# EAGLE board Display-KeyboardModule_v8 (EAGLE 9.6.2)
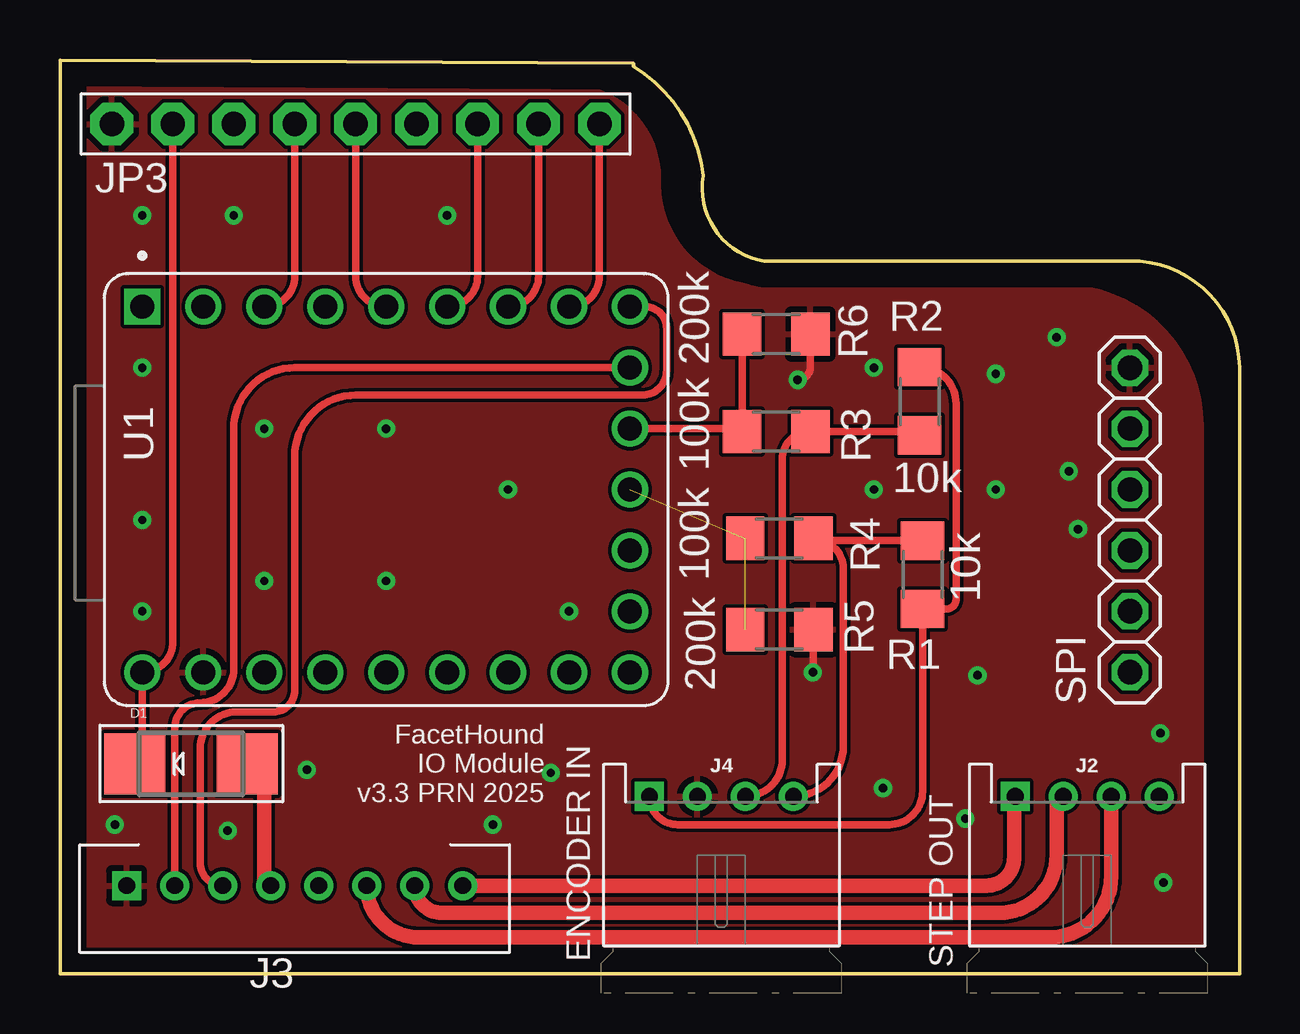
[diagram p0: board, top side]
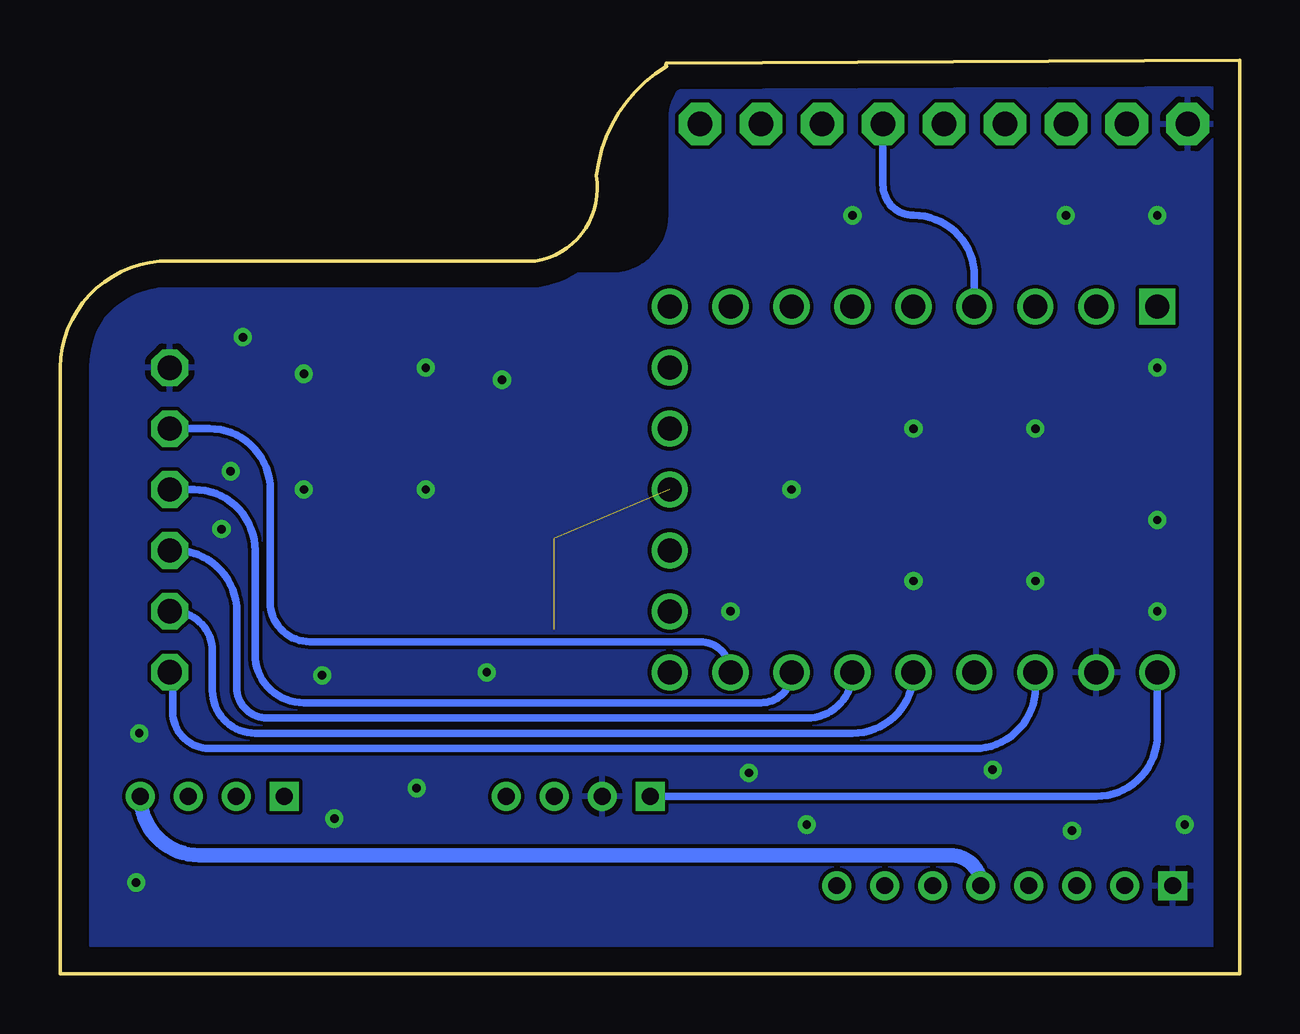
[diagram p1: board, bottom side, seen from below]

Size 49.15 x 38.1 mm. Coordinates in mm from the lower left corner, seen from the top.
Outline: 0,38.1 0,0 49.15,0 49.15,25.27 arc90 44.58,29.72 29.34,29.72 arc-90 26.8,33.27 arc52 23.88,37.85 arc90 23.88,37.97 0,38.1
Copper layers (1*16): Top 0.035mm / dielectric 1.5mm / Bottom 0.035mm
Design rules "default": minimum track width 6mil, minimum drill 0.35mm, track to track 6mil, track to pad 6mil, pad to pad 6mil, via to via 6mil, smd to smd 6mil, copper to edge 40mil, drill to drill 6mil, minimum pad ring 10mil, minimum via ring 8mil, stop-mask expansion 4mil, vias tented up to drill 0mil, thermal gap 10mil

## Footprints (pad centres in the part's own frame; a part is rotated, then mirrored left to right if it is on the bottom)
SMADIODE = smd 2.54 x 2.54: A 2.349,0; C -2.349,0
S4B-PH-KL = drill 0.7 square: 1 3,-3.72 | drill 0.7: 2 1,-3.72; 3 -1,-3.72; 4 -3,-3.72
B8B-PH-K-S = drill 0.7 square: 1 7,0 | drill 0.7: 2 5,0; 3 3,0; 4 1,0; 5 -1,0; 6 -3,0; 7 -5,0; 8 -7,0
1X09-BIG = drill 1.016 pad 1.778 octagon: 1 -10.16,0; 2 -7.62,0; 3 -5.08,0; 4 -2.54,0; 5 0,0; 6 2.54,0; 7 5.08,0; 8 7.62,0; 9 10.16,0
R1206 = smd 1.6 x 1.803: 1 -1.422,0; 2 1.422,0
1X06 = drill 1.016 octagon: 1 -6.35,0; 2 -3.81,0; 3 -1.27,0; 4 1.27,0; 5 3.81,0; 6 6.35,0
MODULE_RP2040-ZERO = drill 1 square: 1 7.62,10.16 | drill 1: 2 7.62,7.62; 3 7.62,5.08; 4 7.62,2.54; 5 7.62,0; 6 7.62,-2.54; 7 7.62,-5.08; 8 7.62,-7.62; 9 7.62,-10.16; 10 5.08,-10.16; 11 2.54,-10.16; 12 0,-10.16; 13 -2.54,-10.16; 14 -5.08,-10.16; 15 -7.62,-10.16; 16 -7.62,-7.62; 17 -7.62,-5.08; 18 -7.62,-2.54; 19 -7.62,0; 20 -7.62,2.54; 21 -7.62,5.08; 22 -7.62,7.62; 23 -7.62,10.16

## Placement (x,y rotation side)
D1  [SMADIODE]  5.46,8.76 0 top
J2  JST-PH-4_TH-RA  [S4B-PH-KL]  42.8,3.68 180 top
J3  B8B-PH-K-S  [B8B-PH-K-S]  9.78,3.68 180 top
J4  JST-PH-4_TH-RA  [S4B-PH-KL]  27.56,3.68 180 top
JP3  [1X09-BIG]  12.32,35.43 0 top
R1  10k  [R1206]  35.94,16.64 270 top
R2  10k  [R1206]  35.81,23.88 90 top
R3  100k  [R1206]  29.84,22.61 180 top
R4  100k  [R1206]  29.97,18.16 180 top
R5  200k  [R1206]  29.97,14.35 0 top
R6  200k  [R1206]  29.84,26.67 0 top
SPI  [1X06]  44.58,18.92 90 top
U1  RP2040-ZERO'  [MODULE_RP2040-ZERO]  13.59,20.19 90 top

## Library data of the parts
D1 JP3 R1-R6 SPI = adafruit
J2 J4 = con-JST-PH; MF: JST; MPN: S4B-PH-KL
J3 = con-JST-PH
U1 = RP2040-ZERO; AVAILABILITY: Not in stock; CHECK_PRICES: https://www.snapeda.com/parts/RP2040-ZERO/Waveshare+Electronics/view-part/?ref=eda; DESCRIPTION: Low-Cost, High-Performance Pico-Like MCU Board Based On Raspberry Pi Microcontroller RP2040; MF: Waveshare Electronics; MP: RP2040-ZERO; PACKAGE: Package; PRICE: None; SNAPEDA_LINK: https://www.snapeda.com/parts/RP2040-ZERO/Waveshare+Electronics/view-part/?ref=snap

## Nets
5V: D1.C J4.1 JP3.2 R1.2 R2.2 U1.23
GND: J3.1 J4.2 JP3.1 R5.2 R6.2 SPI.6 U1.22
N$1: D1.A J3.4
N$2: J2.1 J3.8
N$3: JP3.4 U1.3
N$4: J3.3 U1.9
N$5: J3.2 U1.10
N$6: JP3.6 U1.4
N$7: JP3.5 U1.5
N$8: JP3.7 U1.6
N$9: JP3.8 U1.7
N$10: JP3.9 U1.8
N$11: SPI.2 U1.19
N$12: J4.3 R2.1 R3.1
N$13: J2.2 J3.7
N$14: J2.3 J3.6
N$15: J2.4 J3.5
N$16: SPI.3 U1.18
N$17: J4.4 R1.1 R4.1
N$18: SPI.4 U1.17
N$20: R3.2 R6.1 U1.11
N$21: SPI.5 U1.16
N$22: SPI.1 U1.21
N$23: R4.2 R5.1 U1.12

## Tracks (layer width: path | path; a pad name or v marks a point on that pad's centre or on a via)
5V
  Top 0.305: JP3.2 4.7,13.84 arc-90 U1.23 3.43,9.08 arc-90 D1.C | R2.2 arc-90 37.34,23.77 37.34,15.62 arc-90 36.93,15.21 R1.2 35.94,7.62 arc-90 34.54,6.22 25.74,6.22 arc-90 J4.1
  Top 0.61: 3.43,9.08 D1.C
  Bottom 0.305: U1.23 3.43,9.94 arc90 5.97,7.4 J4.1
GND  (via drill 0.35)
  Top 0.305: R6.2 31.27,25.3 arc-90 v30.73,24.77 | R5.2 31.39,12.6 arc-90 v31.37,12.57
  other vias: 3.43,15.11 3.43,18.92 3.43,25.27 3.43,31.62 7.24,31.62 16.13,31.62 13.59,22.73 8.51,22.73 8.51,16.38 13.59,16.38 18.67,20.19 21.21,15.11 33.91,20.19 33.91,25.27 41.53,26.54 38.99,20.19 38.99,25.02 42.04,20.96 42.42,18.54 38.23,12.45 45.85,10.03 34.29,7.75 37.72,6.48 45.97,3.81 20.45,8.38 18.03,6.22 6.98,5.97 2.29,6.22 10.29,8.51
  pour Bottom: 0.89,37.59 0.89,1.14 47.88,1.14 47.88,25.27 arc90 43.94,29.21 26.16,29.21 arc-90 23.75,31.62 23.75,35.69 arc90 21.84,37.59
  pour Top: 0.89,37.08 0.89,1.14 47.62,1.14 47.62,22.86 arc90 41.78,28.7 29.21,28.7 arc-90 25.02,32.89 25.02,33.15 arc90 21.08,37.08
N$1
  Top 0.61: J3.4 8.51,3.95 8.51,8.76 D1.A
N$2
  Top 0.61: J3.8 38.61,3.68 arc90 39.75,4.83 39.75,7.36 arc-90 J2.1
N$3
  Top 0.305: U1.3 arc90 9.78,29.08 JP3.4
N$4
  Top 0.305: J3.3 arc-90 5.84,4.62 5.84,9.4 arc-90 7.37,10.92 8.89,10.92 arc90 9.78,11.81 9.78,21.59 arc-90 12.32,24.13 24.26,24.13 arc90 25.27,25.15 25.27,26.92 arc90 24.38,27.81 U1.9
N$5
  Top 0.305: J3.2 4.78,10.24 arc-90 5.84,11.3 arc90 7.24,12.7 7.24,22.73 arc-90 9.78,25.27 U1.10
N$6
  Bottom 0.305: U1.4 11.05,29.08 arc-90 13.59,31.62 arc90 14.86,32.89 JP3.6
N$7
  Top 0.305: U1.5 arc-90 12.32,29.08 JP3.5
N$8
  Top 0.305: U1.6 arc90 17.4,29.08 JP3.7
N$9
  Top 0.305: U1.7 arc90 19.94,29.08 JP3.8
N$10
  Top 0.305: U1.8 arc90 22.48,29.08 JP3.9
N$11
  Bottom 0.305: U1.19 arc90 16.13,10.03 41.02,10.03 arc90 42.8,11.81 42.8,13.46 arc-90 44.45,15.11 SPI.2
N$12
  Top 0.305: J4.3 arc90 30.1,8.94 30.1,21.46 arc-90 31.24,22.61 R3.1 35.66,22.61 arc-90 R2.1
N$13
  Top 0.61: J3.7 arc90 15.92,2.54 39.12,2.54 arc90 41.53,4.95 41.53,7.13 arc-90 J2.2
N$14
  Top 0.61: J3.6 arc90 14.94,1.52 41.26,1.52 arc90 43.8,4.06 J2.3
N$15
  Bottom 0.61: J3.5 arc-90 12.05,4.95 43.35,4.95 arc90 J2.4
N$16
  Bottom 0.305: U1.18 arc90 18.03,10.67 40.51,10.67 arc90 41.78,11.94 41.78,15.11 arc-90 44.32,17.65 SPI.3
N$17
  Top 0.305: R4.1 arc90 31.5,18.06 | 31.5,18.06 R1.1 | J4.4 arc90 32.64,9.48 32.64,16.92 arc90 31.5,18.06
N$18
  Bottom 0.305: U1.17 arc90 19.94,11.3 38.99,11.3 arc90 41.02,13.33 41.02,17.65 arc-90 43.56,20.19 SPI.4
N$20
  Top 0.305: U1.11 28.3,22.73 R3.2 R6.1
N$21
  Bottom 0.305: U1.16 arc-90 22.48,13.84 38.73,13.84 arc90 40.39,15.49 40.39,20.19 arc-90 42.93,22.73 SPI.5
N$22
  Bottom 0.305: U1.21 8.51,11.94 arc90 11.05,9.4 42.93,9.4 arc90 44.45,10.92 44.45,12.45 arc-90 SPI.1
N$23  (2 unrouted)

## Text on the board
tPlace: FacetHound / IO Module / v3.3 PRN 2025 | ENCODER IN
tNames: STEP OUT